# EAGLE board TamarinGroupMonitor1 v25 (EAGLE 9.7.0)
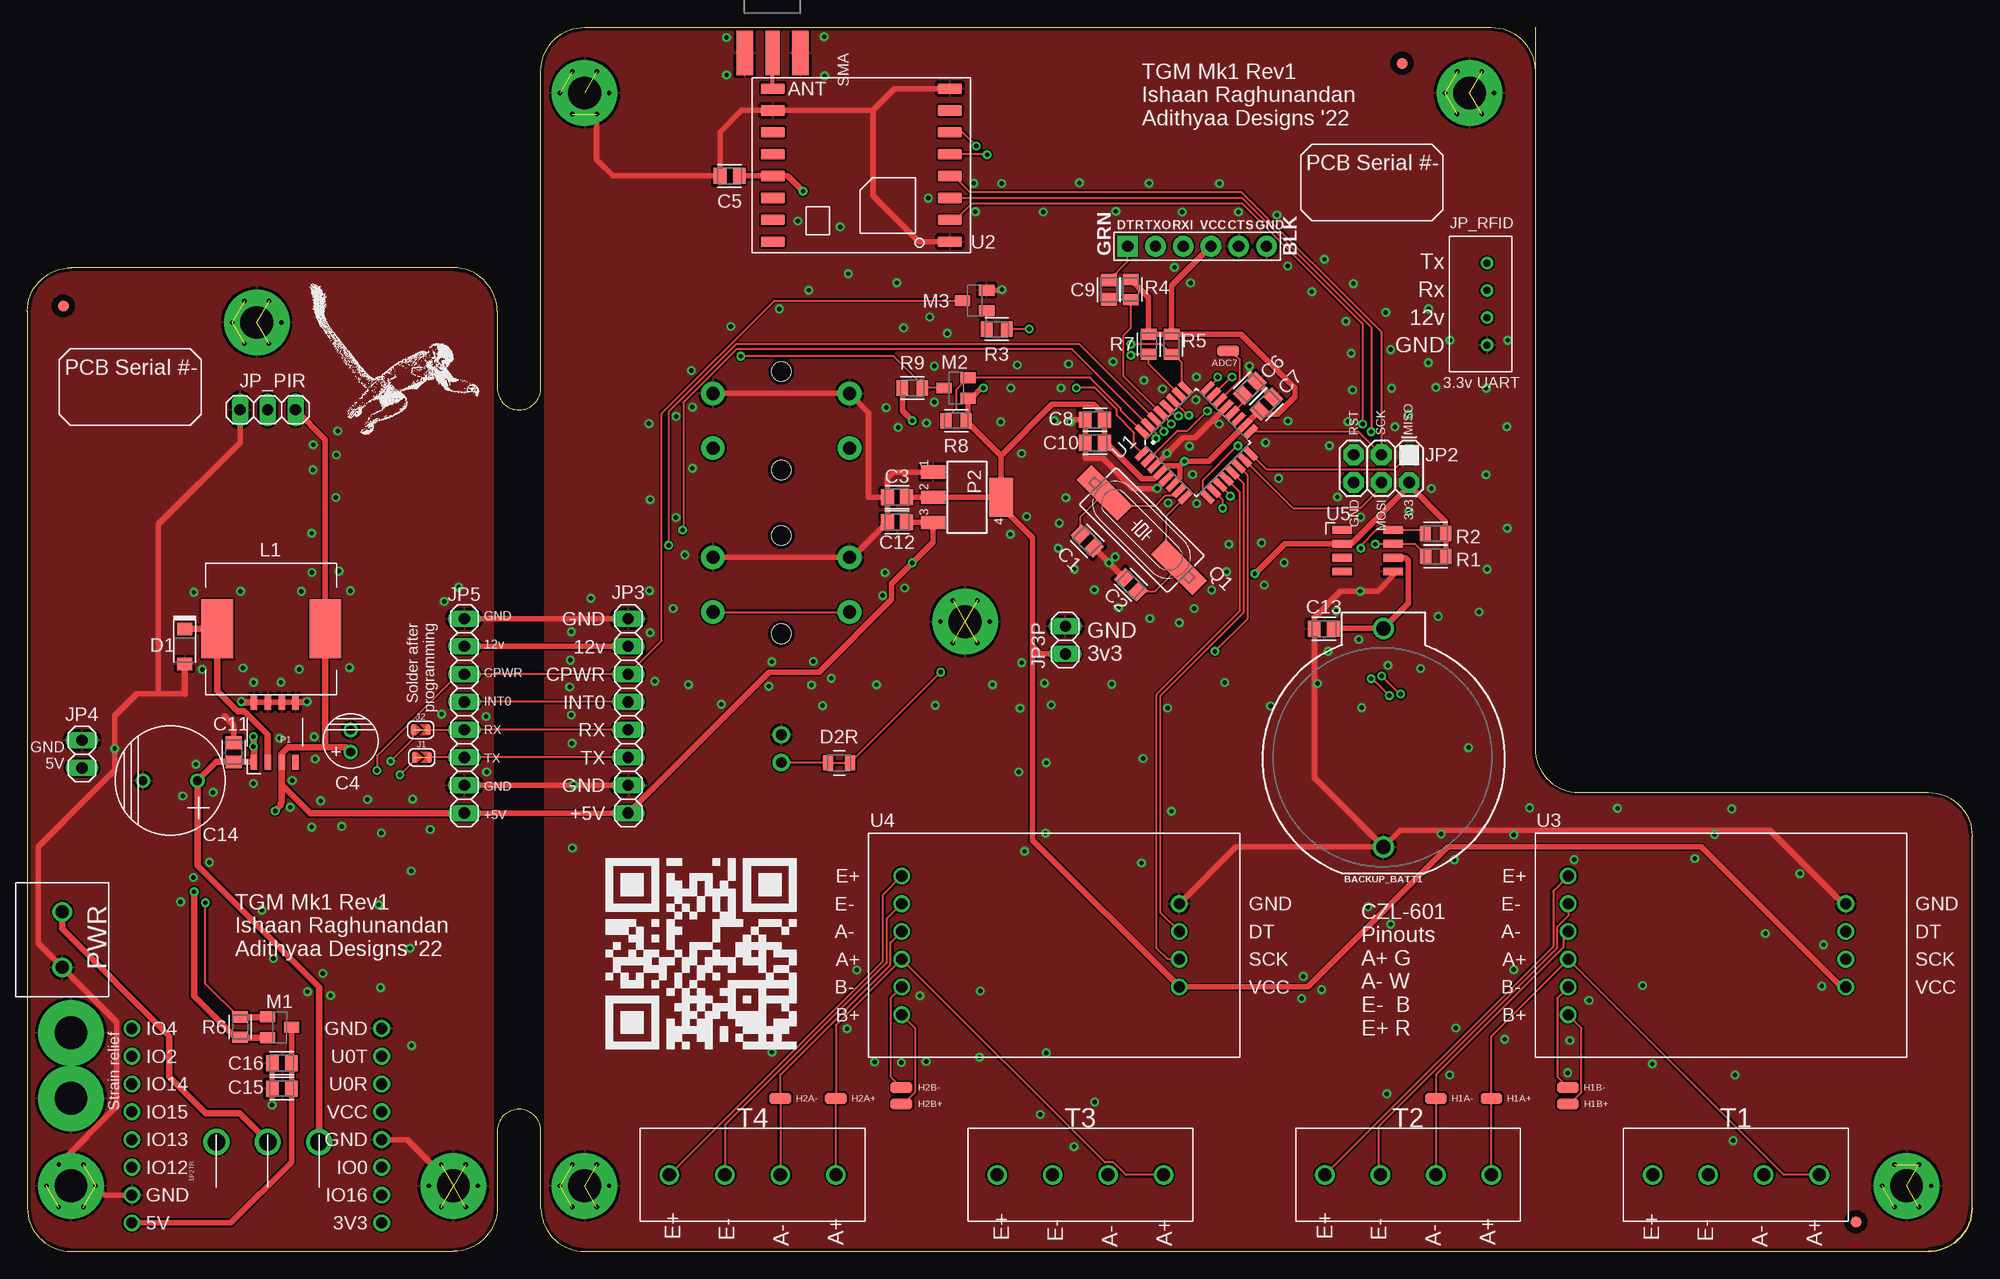
[diagram p0: board, top side]
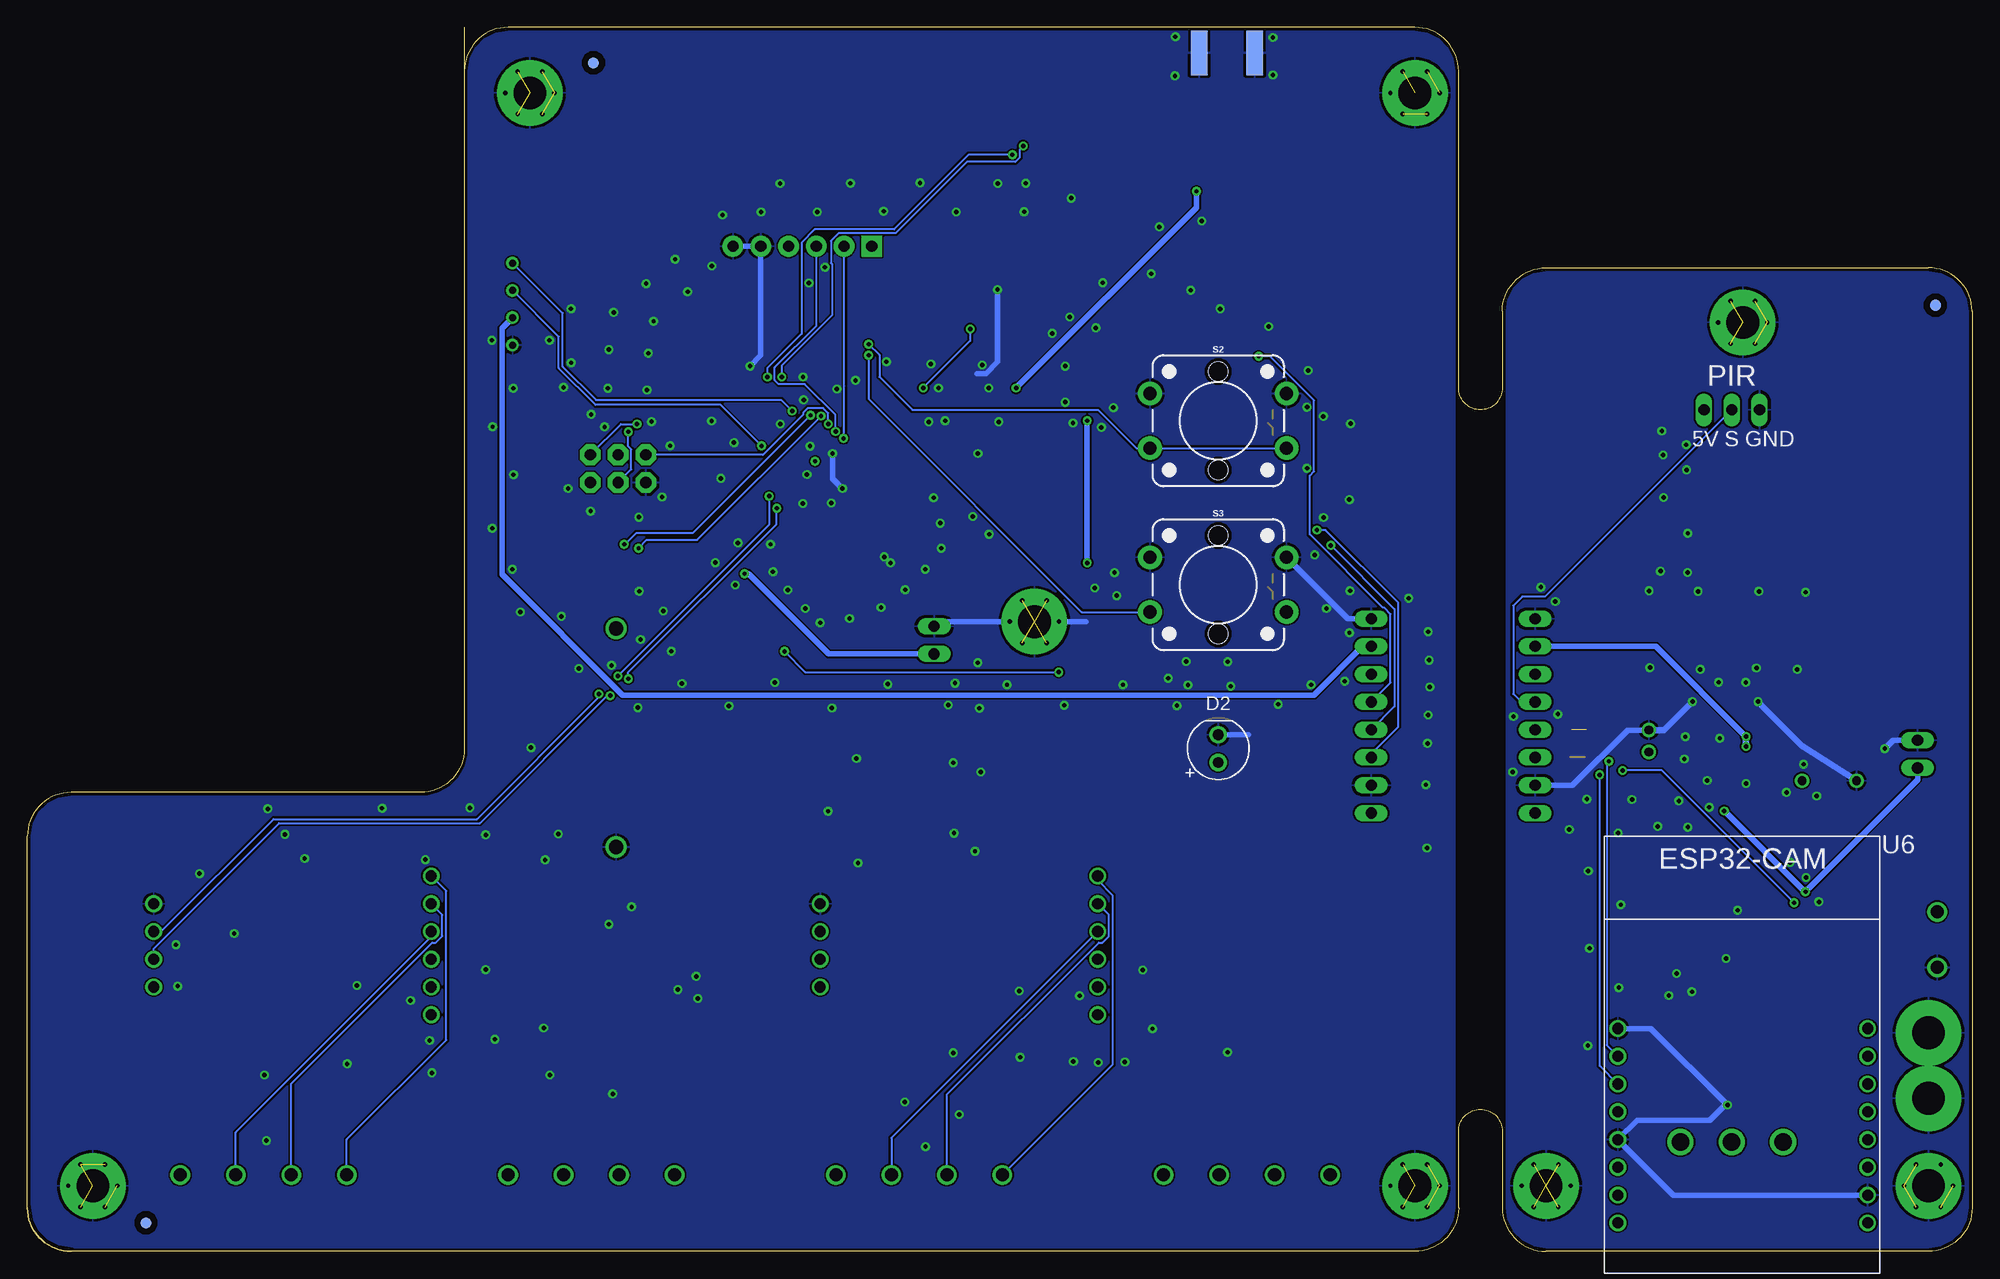
[diagram p1: board, bottom side, seen from below]

Size 178 x 112 mm. Coordinates in mm from the lower left corner, seen from the top.
Outline: 138,112 138,108
Outline: 138,108 138,46 arc90 142,42 174,42 arc-90 178,38 178,4 arc-90 174,0 51,0 arc-90 47,4 47,11 arc90 45,13 arc90 43,11 43,4 arc-90 39,0 4,0 arc-90 0,4 0,86 arc-90 4,90 39,90 arc-90 43,86 43,79 arc90 45,77 arc90 47,79 47,108 arc-90 51,112 134,112 arc-90 138,108
Copper layers (1*16): Top 0.035mm / dielectric 1.5mm / Bottom 0.035mm
Design rules "PCBPower": minimum track width 6mil, minimum drill 0.35mm, track to track 6mil, track to pad 6mil, pad to pad 6mil, via to via 6mil, smd to smd 6mil, copper to edge 12mil, drill to drill 12mil, minimum pad ring 10mil, minimum via ring 8mil, stop-mask expansion 4mil, vias tented up to drill 0.4mm, thermal gap 10mil
Net classes: 1 Power: width 0.5 mm; 2 RF: width 0.35 mm, drill 0.4 mm, clearance 0.203 mm

## Footprints (pad centres in the part's own frame; a part is rotated, then mirrored left to right if it is on the bottom)
BREAKOUT_PAD*1*1X2MM = smd 2 x 1: P$1 0,0
BATTCOM_20MM_PTH = drill 1.3: 1 11.85,0; 2 -8.15,0
CAPC2012X110 = smd 1.165 x 1.465: 1 -0.875,0; 2 0.875,0
CAP_2P_5X11 = drill 0.8: 1 -1,0; 2 1,0
CAP_5P_10X12.5 = drill 0.8: 1 -2.5,0; 2 2.5,0
SODFL3718X115 = smd 1.115 x 1.361: 1 -1.6,0; 2 1.6,0
LEDRD254W60D565H860B_B = drill 0.981 pad 1.581: 1 -1.27,0; 2 1.27,0
RESISTOR_JUMPER_0805_2012 = smd 1 x 1.4: P1 -1,0; P2 1,0
FIDUCIAL_1MM = smd 1 x 1: 1 0,0
MOUNTING_HOLE_3MM = drill 3 pad 6: P1 0,0 | drill 0.4: P2 2.25,0; P3 1.125,-1.948; P4 1.125,1.948; P5 -1.124,-1.948; P6 -2.248,0; P7 -1.124,1.948
PLAIN_HOLE_3MM = drill 3 pad 6: P1 0,0
NO_JUMPER = smd 0.4 x 1: P$1 -0.7,0; P$2 0.7,0
FTDI_DEVICE_SIDE = drill 1.016 pad 1.88 square: P$1 -6.35,0 | drill 1.016 pad 1.88: P$2 -3.81,0; P$3 -1.27,0; P$4 1.27,0; P$5 3.81,0; P$6 6.35,0
2X3 = drill 1.016 pad 1.88 octagon: 1 0,0; 2 0,2.54; 3 2.54,0; 4 2.54,2.54; 5 5.08,0; 6 5.08,2.54
1X08 = drill 1.016 long: 1 -8.89,0; 2 -6.35,0; 3 -3.81,0; 4 -1.27,0; 5 1.27,0; 6 3.81,0; 7 6.35,0; 8 8.89,0
1X02 = drill 1.016 long: 1 -1.27,0; 2 1.27,0
1X03 = drill 1.016 long: 1 -2.54,0; 2 0,0; 3 2.54,0
B4B-XH-A = drill 0.64: 1 0,0; 2 2.5,0; 3 5,0; 4 7.5,0
INDUCTOR_12X12MM = smd 5.4 x 2.9: P$1 0,4.95; P$2 0,-4.95
SOT23 = smd 1 x 1.4: 1 -0.95,-1.1; 2 0.95,-1.1; 3 0,1.1
XL1509_SOIC8 = smd 1.4 x 0.6: P1 -2.75,1.905; P2 -2.75,0.635; P3 -2.75,-0.635; P4 -2.75,-1.905; P5 2.75,-1.905; P6 2.75,-0.635; P7 2.75,0.635; P8 2.75,1.905
SOT223 = smd 1.219 x 2.235: 1 -2.311,-3.099; 2 0,-3.099; 3 2.311,-3.099 | smd 3.6 x 2.2: 4 0,3.099
TERMBLK_508-2N = drill 1.2: 1 0,0; 2 5.08,0
HC49UP = smd 5.334 x 1.93: 1 -4.826,0; 2 4.826,0
RESC2012X65 = smd 1.031 x 1.42: 1 -0.919,0; 2 0.919,0
1P2T_SLIDE_SWITCH_RIGHT = drill 1.6: P1 0,4.7; P2 0,0; P3 0,-4.7
TACTILE_SWITCH_PTH_12MM = drill 1.2 pad 2.159: 1 6.25,-2.5; 2 -6.25,-2.5; 3 6.25,2.5; 4 -6.25,2.5 | hole 1.8: 0,4.5; 0,-4.5
SMA_EDGELAUNCH = smd 4.064 x 1.524: GND@1 2.032,-2.54; GND@2 2.032,2.54 | smd 4.064 x 1.524 bottom: GND@3 2.032,2.54; GND@4 2.032,-2.54 | smd 4.064 x 1.27: P 2.032,0
TERMBLK_508-4N = drill 1.2: 1 0,0; 2 5.08,0; 3 10.16,0; 4 15.24,0
QFP32_7X7_0.80 = smd 1.5 x 0.55: 1 -4.2,2.8; 2 -4.2,2; 3 -4.2,1.2; 4 -4.2,0.4; 5 -4.2,-0.4; 6 -4.2,-1.2; 7 -4.2,-2; 8 -4.2,-2.8; 17 4.2,-2.8; 18 4.2,-2; 19 4.2,-1.2; 20 4.2,-0.4; 21 4.2,0.4; 22 4.2,1.2; 23 4.2,2; 24 4.2,2.8 | smd 0.55 x 1.5: 9 -2.8,-4.2; 10 -2,-4.2; 11 -1.2,-4.2; 12 -0.4,-4.2; 13 0.4,-4.2; 14 1.2,-4.2; 15 2,-4.2; 16 2.8,-4.2; 25 2.8,4.2; 26 2,4.2; 27 1.2,4.2; 28 0.4,4.2; 29 -0.4,4.2; 30 -1.2,4.2; 31 -2,4.2; 32 -2.8,4.2
LORA_RFM95W-915S2_16MODULE = smd 2.2 x 1: P1 -8.1,7; P2 -8.1,5; P3 -8.1,3; P4 -8.1,1; P5 -8.1,-1; P6 -8.1,-3; P7 -8.1,-5; P8 -8.1,-7; P9 8.1,-7; P10 8.1,-5; P11 8.1,-3; P12 8.1,-1; P13 8.1,1; P14 8.1,3; P15 8.1,5; P16 8.1,7
HX711_BREAKOUT = drill 1.016: A+ -13.97,-1.27; A- -13.97,1.27; B+ -13.97,-6.35; B- -13.97,-3.81; DT 11.43,1.27; E+ -13.97,6.35; E- -13.97,3.81; GND 11.43,3.81; SCK 11.43,-1.27; VCC 11.43,-3.81
DS3231MZ+_SOIC8 = smd 1.78 x 0.72: P1 -2.34,1.905; P2 -2.34,0.635; P3 -2.34,-0.635; P4 -2.34,-1.905; P5 2.34,-1.905; P6 2.34,-0.635; P7 2.34,0.635; P8 2.34,1.905
ESP32-CAM-FOOTPRINT = drill 1.016: P1 -11.43,8.89; P2 -11.43,6.35; P3 -11.43,3.81; P4 -11.43,1.27; P5 -11.43,-1.27; P6 -11.43,-3.81; P7 -11.43,-6.35; P8 -11.43,-8.89; P9 11.43,-8.89; P10 11.43,-6.35; P11 11.43,-3.81; P12 11.43,-1.27; P13 11.43,1.27; P14 11.43,3.81; P15 11.43,6.35; P16 11.43,8.89

## Placement (x,y rotation side)
ADC7  BREAKOUT_PADL  [BREAKOUT_PAD*1*1X2MM]  109.9,82.4 0 top
BACKUP_BATT1  [BATTCOM_20MM_PTH]  124.12,45.15 90 top
C1  33pF  [CAPC2012X110]  97,65 135 top
C2  33pF  [CAPC2012X110]  101,61 315 top
C3  10uF  [CAPC2012X110]  79.6,69 0 top
C4  100uF  [CAP_2P_5X11]  29.59,46.7 90 top
C5  0.1uF  [CAPC2012X110]  64.28,98.4 180 top
C6  0.1uF  [CAPC2012X110]  111.9,78.97 225 top
C7  0.1uF  [CAPC2012X110]  113.4,77.5 45 top
C8  0.1uF  [CAPC2012X110]  97.7,76.1 180 top
C9  0.1uF  [CAPC2012X110]  99,88 90 top
C10  4.7uF  [CAPC2012X110]  97.7,74 180 top
C11  1uF  [CAPC2012X110]  18.88,45.66 90 top
C12  10uF  [CAPC2012X110]  79.6,66.7 180 top
C13  1uF  [CAPC2012X110]  118.66,56.98 180 top
C14  470uF  [CAP_5P_10X12.5]  13.08,43.07 180 top
C15  1uF  [CAPC2012X110]  23.3,14.9 180 top
C16  0.1uF  [CAPC2012X110]  23.3,17.2 180 top
D1  [SODFL3718X115]  14.4,55.34 270 top
D2  LED_BLUE  [LEDRD254W60D565H860B_B]  69,46 90 bottom
D2R  [RESISTOR_JUMPER_0805_2012]  74.3,44.7 0 top
F1  FIDUCIAL  [FIDUCIAL_1MM]  3.3,86.5 0 top
F2  FIDUCIAL  [FIDUCIAL_1MM]  167.36,2.7 0 top
F3  FIDUCIAL  [FIDUCIAL_1MM]  125.82,108.7 0 top
F4  FIDUCIAL  [FIDUCIAL_1MM]  3.36,86.57 0 bottom
F5  FIDUCIAL  [FIDUCIAL_1MM]  167.14,2.61 0 bottom
F6  FIDUCIAL  [FIDUCIAL_1MM]  126.19,108.75 0 bottom
H1  MOUNTING_HOLES  [MOUNTING_HOLE_3MM]  51,106 0 top
H1A+  BREAKOUT_PADL  [BREAKOUT_PAD*1*1X2MM]  134,14 0 top
H1A-  BREAKOUT_PADL  [BREAKOUT_PAD*1*1X2MM]  128.92,14 0 top
H1B+  BREAKOUT_PADL  [BREAKOUT_PAD*1*1X2MM]  141,13.5 0 top
H1B-  BREAKOUT_PADL  [BREAKOUT_PAD*1*1X2MM]  141,15 0 top
H2  MOUNTING_HOLES  [MOUNTING_HOLE_3MM]  132,106 0 top
H2A+  BREAKOUT_PADL  [BREAKOUT_PAD*1*1X2MM]  74,14 0 top
H2A-  BREAKOUT_PADL  [BREAKOUT_PAD*1*1X2MM]  68.92,14 0 top
H2B+  BREAKOUT_PADL  [BREAKOUT_PAD*1*1X2MM]  80,13.5 0 top
H2B-  BREAKOUT_PADL  [BREAKOUT_PAD*1*1X2MM]  80,15 0 top
H3  MOUNTING_HOLES  [MOUNTING_HOLE_3MM]  85.83,57.62 0 top
H4  MOUNTING_HOLES  [MOUNTING_HOLE_3MM]  172,6 0 top
H5  MOUNTING_HOLES  [MOUNTING_HOLE_3MM]  51,6 0 top
H6  MOUNTING_HOLES  [MOUNTING_HOLE_3MM]  21,85 0 top
H7  MOUNTING_HOLES  [MOUNTING_HOLE_3MM]  4,6 0 top
H8  MOUNTING_HOLES  [MOUNTING_HOLE_3MM]  39,6 0 top
H9  MOUNTING_HOLESPLAIN  [PLAIN_HOLE_3MM]  4,20 0 top
H10  MOUNTING_HOLESPLAIN  [PLAIN_HOLE_3MM]  4,14 0 top
J1  NO_JUMPER  [NO_JUMPER]  36.1,45.2 0 top
J2  NO_JUMPER  [NO_JUMPER]  36,47.72 0 top
JP1  FTDI_DEVICE  [FTDI_DEVICE_SIDE]  107.06,91.97 0 top
JP2  AVR_SPI_PRG_6PTH  [2X3]  126.47,72.89 180 top
JP3  PINHD-1X8  [1X08]  55,49 90 top
JP3P  PINHD-1X2  [1X02]  95,55.93 90 top
JP4  PINHD-1X2  [1X02]  5,45.5 90 top
JP5  PINHD-1X8  [1X08]  40,49 90 top
JP_PIR  PINHD-1X3  [1X03]  22,77 0 top
JP_RFID  3A/250V  [B4B-XH-A]  133.59,82.93 90 top
L1  68uh  [INDUCTOR_12X12MM]  22.32,56.95 90 top
M1  PMOSFET  [SOT23]  23.1,20.5 270 top
M2  NMOSFET  [SOT23]  85,79 90 top
M3  NMOSFET  [SOT23]  86.7,87 90 top
P1  XL1509  [XL1509_SOIC8]  22.65,47.51 90 top
P2  LDO-LM11173.3MP  [SOT223]  86,69 270 top
PWR  2828XX-2282837-2  [TERMBLK_508-2N]  3.2,31.06 270 top
Q1  4MHz  [HC49UP]  102,66 135 top
R1  4.7k  [RESC2012X65]  128.9,63.58 180 top
R2  4.7k  [RESC2012X65]  128.88,65.68 180 top
R3  470R  [RESC2012X65]  88.72,84.38 180 top
R4  10k  [RESC2012X65]  101,88 270 top
R5  10k  [RESC2012X65]  104.72,83 270 top
R6  10k  [RESC2012X65]  19.48,20.52 90 top
R7  10k  [RESC2012X65]  102.62,83 270 top
R8  10k  [RESC2012X65]  85,76 180 top
R9  10k  [RESC2012X65]  81,79 0 top
S1  1P2T_SLIDE_SWITCHRIGHT  [1P2T_SLIDE_SWITCH_RIGHT]  22,10 90 top
S2  MOMENTARY-SWITCH-SPST-PTH-12MM  [TACTILE_SWITCH_PTH_12MM]  69,76 0 bottom
S3  MOMENTARY-SWITCH-SPST-PTH-12MM  [TACTILE_SWITCH_PTH_12MM]  69,61 0 bottom
SMA  [SMA_EDGELAUNCH]  68.2,111.68 270 top
T1  2828XX-4282837-4  [TERMBLK_508-4N]  164,7 180 top
T2  2828XX-4282837-4  [TERMBLK_508-4N]  134,7 180 top
T3  2828XX-4282837-4  [TERMBLK_508-4N]  104,7 180 top
T4  2828XX-4282837-4  [TERMBLK_508-4N]  74,7 180 top
U1  ATMEGA328P-AU  [QFP32_7X7_0.80]  107,74 45 top
U2  LORA_RFM95W-915S2_MODULE  [LORA_RFM95W-915S2_16MODULE]  76.33,99.39 180 top
U3  HX711_BREAKOUT  [HX711_BREAKOUT]  155,28 0 top
U4  HX711_BREAKOUT  [HX711_BREAKOUT]  94,28 0 top
U5  DS3231MZ+  [DS3231MZ+_SOIC8]  122.66,64.11 0 top
U6  ESP32-CAM  [ESP32-CAM-FOOTPRINT]  21,11.5 0 top
U$1  [SQUIRREL_MONKE]  34,79 0 top
U$2  [TRAKGIT]  51.77,17.24 0 top

## Library data of the parts
ADC7 D2R F1-F6 H1 H1A+ H1A- H1B+ H1B- H2 H2A+ H2A- H2B+ H2B- H3-H10 J1 J2 JP1 JP2 SMA U3 U4 U6 U$1 U$2 = CDC Library
BACKUP_BATT1 = CDC Library; LINK: https://www.evelta.com/3v-litium-battery-holder/; PROD_ID: BATT-09031; SF_SKU: PRT-00783
C1 C2 = Capacitor; CATEGORY: Capacitor; LINK: https://www.evelta.com/33-pf-50v-0805-smd-multilayer-ceramic-capacitors-0805cg330j500nt-fenghua/
C3 C12 = Capacitor; CATEGORY: Capacitor; LINK: https://www.sunrom.com/p/10uf-106-smd-0805-pack-of-10
C4 = CDC Library; LINK: https://www.evelta.com/100uf-25v-electrolytic-capacitor/
C5-C9 C16 = Capacitor; CATEGORY: Capacitor; LINK: https://www.sunrom.com/p/100nf-104-0805-2012-metric
C10 = Capacitor; CATEGORY: Capacitor; LINK: https://www.evelta.com/4-7-uf-16v-0805-smd-multi-layer-ceramic-capacitor-0805x475k160ct-walsin/
C11 C13 C15 = Capacitor; CATEGORY: Capacitor; LINK: https://www.sunrom.com/p/1uf-105-smd-0805-pack-of-10
C14 = CDC Library; LINK: https://www.evelta.com/470uf-25v-electrolytic-capacitor/
D1 = CDC Library; LINK: https://www.sunrom.com/p/1n5819-b5819w-1n5819w-s4-sod123-1206-1a-40v-schottky-diode
D2 = Opto-Electronic; CATEGORY: Opto-Electronic; LINK: https://www.sunrom.com/p/blue-led-3mm; SUB-CATEGORY: LED
JP3 JP3P JP4 JP5 JP_PIR = Connector; CATEGORY: CONNECTOR; SUB-CATEGORY: PIN-HEADER
JP_RFID = Connector; CATEGORY: CONNECTOR; DSECRIPTION: 2.5mm pitch/disconnctable crimp style connector; MANUFACTURER: JST (XH connector); MPN: B4B-XH-A; OPERATING_TEMPERATURE: -25 C to 85 C; PART_STATUS: ACTIVE; ROHS_COMPLIANT: COMPLAINT; SERIES: B4B-XH-A; SUB_CATEGORY: Through hole; TYPE: TOP ENTRY
L1 = CDC Library; LINK: https://www.sunrom.com/p/68uh-680-12mm-inductor
M1 = Transistor; CATEGORY: Transistor; LINK1: https://www.sunrom.com/p/ao3401-a19t-sot-23-p-ch-mosfet; SUB-CATEGORY: MOSFET; TYPE: P-Channel
M2 M3 = Transistor; CATEGORY: Transistor; LINK: https://www.evelta.com/bss138lt1g-50v-220ma-n-channel-transistor-surface-mount-sot-23-3/; SUB-CATEGORY: MOSFET; TYPE: N-Channel
P1 = CDC Library; LINK: https://www.sunrom.com/m/6161
P2 = CDC Library; LINK: https://www.sunrom.com/m/4004; MF: Texas Instruments; MPN: LM1117MP-3.3; OC_FARNELL: 9778195; OC_NEWARK: 28X3416
PWR = Connector; CATEGORY: Connector; DESCRIPTION: 2 Position Wire to Board Terminal Block Horizontal with Board 5.08 mm Through Hole; LINK: https://robu.in/product/12v-8-x-aa-battery-clip-slot-holder-stack-box-case/; MANUFACTURER: TE Connectivity; MPN: 282837-2; OPERATING_TEMPERATURE: -40°C to +105°C; PART_STATUS: ACTIVE; ROHS_COMPLIANCE: RoHS Compliant; SERIES: 282837; SUBCATEGORY: Terminal Block; TYPE: Side Wire Entry
Q1 = CDC Library; LINK: https://www.evelta.com/hc-49smd-4mhz-20pf-20ppm-2pad-smd-smt-quartz-crystal/; OC_FARNELL: unknown; OC_NEWARK: unknown
R1 R2 = Resistor; CATEGORY: Resistor; LINK: https://www.sunrom.com/p/4k7-1-0805-pack-of-100; SUB-CATEGORY: Fixed
R3 = Resistor; CATEGORY: Resistor; LINK: https://www.sunrom.com/p/470r-1-0805-pack-of-100; SUB-CATEGORY: Fixed
R4-R9 = Resistor; CATEGORY: Resistor; LINK: https://www.sunrom.com/p/10k-1-0805-pack-of-100; SUB-CATEGORY: Fixed
S1 = CDC Library; LINK: https://www.sunrom.com/p/slide-switch-1p2t-high-current-right-angle
S2 S3 = CDC Library; LINK: https://www.sunrom.com/p/tactile-switch-square-head-omron-b3f-4055-12x12x73mm; PROD_ID: SWCH-09185; SF_SKU: COM-09190
T1-T4 = Connector; CATEGORY: Connector; DESCRIPTION: TERM BLK 4P SIDE ENT 5.08mm PCB; MANUFACTURER: TE Connectivity; MPN: 282837-4; OPERATING_TEMPERATURE: 40°C to +105°C; PART_STATUS: Active; ROHS_COMPLIANCE: RoHS Compliant; SERIES: 283737; SUBCATEGORY: Terminal Block; TYPE: Side Wire Entry
U1 = CDC Library; LINK: https://www.evelta.com/atmega328p-au-ic-mcu-8bit-32kb-flash-32tqfp/
U2 = CDC Library; LINK: https://www.digikey.in/product-detail/en/rf-solutions/RFM95W-915S2/RFM95W-915S2-ND/6564923
U5 = CDC Library; LINK: https://www.evelta.com/ds3231mz-maxim-integrated-alarm-rtc-i2c-2-3-v-to-5-5-v/

## Nets
+3.3V [Power]: C3.2 C5.1 C7.1 C8.1 C10.1 JP1.P$4 JP2.2 JP3P.1 M2.1 P2.2 P2.4 R1.1 R2.1 R4.1 R5.1 R7.1 R8.1 U1.4 U1.6 U1.18 U2.P13 U3.VCC U4.VCC U5.P2
+5V [Power]: C4.1 C12.1 JP3.1 JP4.1 JP5.1 JP_PIR.3 L1.P$2 M1.2 P1.P3 P2.3 R6.1 R9.1
+12V [Power]: C11.1 C14.1 JP3.7 JP5.7 JP_RFID.2 P1.P1 S1.P3
ADC7: ADC7.P$1 U1.22
AREF: C6.2 U1.20
BATT [Power]: PWR.1 S1.P2
CAMPWR: JP3.6 JP5.6 M1.1 M3.3 R6.2
CPWR: M3.1 R3.2
CPWR_3V3: R3.1 U1.1
CS_LR: U1.23 U2.P5
DTR: C9.2 JP1.P$1
ESP32_PWR [Power]: C15.1 C16.1 M1.3 U6.P8
GND [Power]: BACKUP_BATT1.2 C1.1 C2.1 C3.1 C4.2 C5.2 C6.1 C7.2 C8.2 C10.2 C11.2 C12.2 C13.2 C14.2 C15.2 C16.2 D1.2 D2.2 H1.P1 H1.P2 H1.P3 H1.P4 H1.P5 H1.P6 H1.P7 H2.P1 H2.P2 H2.P3 H2.P4 H2.P5 H2.P6 H2.P7 H3.P1 H3.P2 H3.P3 H3.P4 H3.P5 H3.P6 H3.P7 H4.P1 H4.P2 H4.P3 H4.P4 H4.P5 H4.P6 H4.P7 H5.P1 H5.P2 H5.P3 H5.P4 H5.P5 H5.P6 H5.P7 H6.P1 H6.P2 H6.P3 H6.P4 H6.P5 H6.P6 H6.P7 H7.P1 H7.P2 H7.P3 H7.P4 H7.P5 H7.P6 H7.P7 H8.P1 H8.P2 H8.P3 H8.P4 H8.P5 H8.P6 H8.P7 H9.P1 H10.P1 JP1.P$5 JP1.P$6 JP2.6 JP3.2 JP3.8 JP3P.2 JP4.2 JP5.2 JP5.8 JP_PIR.1 JP_RFID.1 M3.2 P1.P5 P1.P6 P1.P7 P1.P8 P2.1 PWR.2 S2.3 S2.4 S3.3 S3.4 SMA.GND@1 SMA.GND@2 SMA.GND@3 SMA.GND@4 U1.3 U1.5 U1.21 U2.P1 U2.P8 U2.P10 U3.GND U4.GND U5.P5 U6.P7 U6.P12 U6.P16
HC1A+: H1A+.P$1 T1.1 T2.1 U3.A+
HC1A-: H1A-.P$1 T1.2 T2.2 U3.A-
HC1B+: H1B+.P$1 U3.B+
HC1B-: H1B-.P$1 U3.B-
HC1E+: T1.4 T2.4 U3.E+
HC1E-: T1.3 T2.3 U3.E-
HC2A+: H2A+.P$1 T3.1 T4.1 U4.A+
HC2A-: H2A-.P$1 T3.2 T4.2 U4.A-
HC2B+: H2B+.P$1 U4.B+
HC2B-: H2B-.P$1 U4.B-
HC2E+: T3.4 T4.4 U4.E+
HC2E-: T3.3 T4.3 U4.E-
HX1DT: U1.11 U3.DT
HX1SCK: U1.10 U3.SCK
HX2DT: U1.13 U4.DT
HX2SCK: U1.12 U4.SCK
INT0: JP3.5 JP5.5 JP_PIR.2 M2.3 R9.2
INT0_3V3: M2.2 R8.2 U1.32
LED1: D2R.P2 U1.14
LED1A: D2.1 D2R.P1
LR_ANT [RF]: SMA.P U2.P9
MISO: JP2.1 U1.16 U2.P2
MOSI: JP2.4 U1.15 U2.P3
Q1: C2.2 Q1.1 U1.8
Q2: C1.2 Q1.2 U1.7
RESET_LR: U1.24 U2.P6
RFID_RX: JP_RFID.3 U1.9
RFID_TX: JP_RFID.4 U1.2
RST: C9.1 JP2.5 R4.2 U1.29
RTC_BATT [Power]: BACKUP_BATT1.1 C13.1 U5.P6
RXI: J2.P$1 J2.P$2 JP1.P$3 JP3.4 JP5.4 U1.30 U6.P15
SCK: JP2.3 U1.17 U2.P4
SCL: R2.2 U1.28 U5.P8
SDA: R1.2 U1.27 U5.P7
SW2: R5.2 S2.1 S2.2 U1.25
SW3: R7.2 S3.1 S3.2 U1.26
TXO: J1.P$1 J1.P$2 JP1.P$2 JP3.3 JP5.3 U1.31 U6.P14
XLVO [Power]: D1.1 L1.P$1 P1.P2

## Tracks (layer width: path | path; a pad name or v marks a point on that pad's centre or on a via)
+3.3V  (via drill 0.4)
  Top 0.5: U1.6 104.88,70.23 105.49,70.84 105.49,71.89 | 105.49,71.89 105.39,71.79 105.39,71.89 104.32,71.89 U1.4 103.13,70.7 102,70.7 98.7,74 C10.1 C8.1 98.58,76.53 97.6,77.5 93.78,77.5 89.1,72.82 | 105.49,71.89 v105.9,72.3 108.13,72.3 U1.18 112.71,76.88 C7.1 113.06,76.6 114.4,76.6 116,78.2 116,79 111.08,83.92 R5.1 | U3.VCC 166.03,24.19 153.22,37 130,37 117.19,24.19 U4.VCC 92,37.62 92,54.66 | C3.2 P2.2 P2.4 | 92,54.66 92,55.4 | 92,55.4 92,65.3 89.1,68.2 P2.4 | 89.1,72.82 R8.1 86.1,76.18 M2.1 86.4,78.05 87.35,79 v87.5,79 | 89.1,72.82 P2.4 | JP3P.1 92.74,54.66 | 92.74,54.66 92,55.4 | 92.74,54.66 92,54.66 | R1.1 129.82,65.66 R2.1 129.8,66.78 126.47,70.11 | 126.47,70.11 126.47,70 126.42,70 121.17,64.75 U5.P2 115.1,64.75 v112.35,62 | 126.47,70.11 JP2.2 | R4.1 102.62,87.3 R7.1 R5.1 | JP1.P$4 104.72,88.36 R5.1 | C5.1 U2.P13 | U2.P13 | v71,97 69.6,98.4 U2.P13
  Bottom 0.5: JP3P.1 104.66,54.66 112,62 v112.35,62 | v87.5,79 71,95.5 v71,97
+5V  (via drill 0.4)
  Top 0.5: C12.1 P2.3 82.9,64.9 v81,63 79.11,61.11 79.11,59.67 72.44,53 67.89,53 JP3.1 JP5.1 | R9.1 80.08,76.92 v81,76 | JP_PIR.3 27.27,74.27 L1.P$2
  Top 0.61: JP5.1 25.89,40.11 23.28,42.72 | 23.28,42.72 P1.P3 23.28,45.54 23.87,46.12 27,46.12 | 27,46.12 29.17,46.12 C4.1 | L1.P$2 27.27,46.39 27,46.12 | M1.2 19.53,19.55 R6.1 19.01,19.6 15.26,23.35 v15.26,32.9 | 23.28,42.72 23.28,41.07 23.21,41 23.21,40.81 v22.7,40.3
  Bottom 0.5: v81,76 v81,63 | v15.26,32.9 5,43.16 JP4.1
  Bottom 0.61: v15.26,32.9 15.3,32.9 v22.7,40.3
+12V  (via drill 0.4)
  Top 0.5: JP5.7 JP3.7
  Top 0.61: S1.P3 26.7,24.16 15.58,35.28 C14.1 15.58,43.09 17.28,44.78 C11.1 20.72,44.78 P1.P1 20.74,46.2 v20.7,46.2 v20.7,47.1
  Bottom 0.5: v20.7,47.1 28.95,55.35 JP5.7 | JP3.7 55.8,55.35 60.25,50.9 123.5,50.9 134.57,61.96 134.57,84.45 JP_RFID.2
+12V1
  Bottom 0.61: 20.7,47.05 20.7,46.15
ADC7
  Top 0.2: U1.22 111,79.7 111,81.6 110.2,82.4 ADC7.P$1
AREF
  Top 0.2: U1.20 111.28,77.72 C6.2
BATT
  Top 0.61: PWR.1 3.2,29.5 13,19.7 13,16 16.34,12.66 19.43,12.66 22,10.09 S1.P2
CAMPWR  (via drill 0.4)
  Top 0.2: 19.37,21.44 16.3,24.51 v16.3,31.9 | v32,44 32,45.36 39.45,52.81 JP5.6 JP3.6 58.04,55.85 58.04,76.67 68.37,87 M3.3
  Top 0.5: M1.1 21.99,21.44
  Top 0.61: 21.99,21.44 R6.2 19.37,21.44
  Bottom 0.2: v16.3,31.9 28.4,44 v32,44
CPWR
  Top 0.2: R3.2 M3.1
CPWR_3V3  (via drill 0.4)
  Top 0.2: U1.1 101.3,73.76 101.3,74.9 99.71,76.49 99.71,77 97.71,79 v96,79 | v91.7,84.4 91.68,84.38 R3.1
  Bottom 0.2: v96,79 91.7,83.3 v91.7,84.4
CS_LR  (via drill 0.4)
  Top 0.2: v110.26,80 110.17,80 U1.23 | v87.84,100.34 87.8,100.39 U2.P5
  Bottom 0.2: v87.84,100.34 91.84,100.34 98.67,93.52 105.93,93.52 107.14,92.31 107.14,83.96 110.28,80.81 110.28,80.08 110.26,80.06 v110.26,80
DTR
  Top 0.2: C9.2 100.71,90.58 JP1.P$1
ESP32_PWR
  Top 0.5: U6.P8 18.61,2.61 24.17,8.18 C15.1 C16.1 24.17,20.48 M1.3
GND  (via drill 0.4)  (30 unrouted)
  Top 0.5: C1.1 v99,63 C2.1 | U1.5 103.4,69.83 v103.4,69.8 101.2,69.8 98.44,72.56 96.83,72.56 C10.2 C8.2 95.7,76.1 v95.5,75.9 | U1.3 v104.3,73 105.75,74.45 106.89,74.45 U1.21 | U3.GND 166.19,31.81 159.47,38.53 125.65,38.53 BACKUP_BATT1.2 | C3.1 78.72,70.72 79.31,71.31 P2.1 | C3.1 C12.2 75.53,63.5 S3.4 S3.3 | S2.3 S2.4 77,76.75 77,69 C3.1 | U4.GND 110.62,37 BACKUP_BATT1.2 | U5.P5 125,61.8 123.6,60.4 v122,60.4 120.2,60.4 117.78,57.98 C13.2 117.78,43.34 BACKUP_BATT1.2 | JP3.2 JP5.2 | JP3.8 JP5.8 | C7.2 112.55,79.59 C6.1 111.86,80.25 v111.86,81 | M3.2 89.15,87.95 v89.2,88 | U2.P8 79.39,106.39 77.39,104.39 | 77.39,104.39 U2.P10 65.39,104.39 63.41,102.41 C5.2 53.6,98.4 52.12,99.88 H1.P3 | U2.P1 81.61,92.39 77.39,96.61 77.39,104.39 | H8.P1 34.77,10.23 U6.P12 | H7.P7 8.2,13.27 8.2,20.98 PWR.2 1,28.18 1,37 8,44 v8,46 8,49 10,51 12,51 | U6.P7 7.1,5.15 H7.P2 | P1.P5 P1.P8 | C16.2 C15.2 22.42,13.43 v22.4,13.4 | 12,51 14.4,51 | JP_PIR.1 19.46,74 12,66.54 12,51 | C11.2 18.88,48.12 18,49
  Top 0.61: D1.2 14.4,51 | P1.P5 25.56,50.26 v25.6,50.3 | P1.P8 19.64,50.26 v19.6,50.3
  Bottom 0.5: JP3P.2 94.58,57.62 H3.P2 | H3.P1 81.13,57.62 | JP1.P$6 JP1.P$5 110.87,81.99 v111.86,81 | v103.4,69.8 104.3,70.7 v104.3,73 | 55.6,57.89 JP3.8 57.14,57.89 S3.3 | 91.08,80.32 90.28,80.32 89.2,81.4 v89.2,88 | U6.P7 27.35,5.15 U6.P12 30.66,12 24,12 22.5,13.5 | v22.4,13.4 22.5,13.5 | 22.5,13.5 29.39,20.39 U6.P16 | JP4.2 7.23,46.77 v8,46 | 66.22,47.27 D2.2 | JP5.2 36.59,42.65 31.53,47.7 C4.2
  Bottom 0.61: C4.2 28.2,47.7 v25.6,50.3 | C14.2 15.58,46.28 v19.6,50.3
  other vias: 107,80 103.9,78.9 102.2,79.7 89.1,75.9 90.6,81.1 94.6,79 95.3,81.2 83,81 84.2,84 82.6,85.5 80.2,84.5 78.5,62.1 78.3,60 80.3,60.7 99.37,81.4 91,73 94,76 90,79 82.3,75.8 79.7,75.4 78.6,77.2 83,77.7 49.9,36.9 50,42.7 49.8,56.7 49.7,54.1 57,56.6 17,42 106.36,73.68 109.09,75.71 106.95,77.91 106.65,71.09 113.33,74 115.37,75.97 120.87,75.92 119.17,73.71 114.52,70.73 119.9,69.03 122.03,67.18 126.45,67.73 128.51,69.81 125.17,75.44 115.36,90.16 118.71,90.78 117.56,87.81 121.37,88.55 120.68,85.1 124.33,85.92 124.77,82.51 121.16,82.18 124.87,78.98 121.29,78.81 130.21,83.37 128.24,86.25 128.23,81.31 128.92,79.06 126.4,76.59 133.61,62.41 135.45,66.16 133.5,71.06 135.41,75.45 133.53,78.98 135.49,83.37 132.87,58.5 129.12,58.1 127.53,53.34 124.52,53.62 122.13,49.75 118.08,51.96 113.78,49.9 109.58,52.05 104.36,49.72 99.24,51.9 93.71,50 88.34,51.84 83.09,49.97 77.72,51.84 72.78,49.93 67.87,51.71 63.52,50.06 60.51,51.84 57.44,52.17 81.69,23.39 87.21,23.83 87.14,17.76 93.25,18.16 92.7,12.53 95.79,9.58 97.7,13.67 79.98,17.28 77.55,17.33 82.26,17.37 75.02,20.37 68.15,18.22 75.91,25.74 142.93,22.96 140.97,16.33 141.18,19.3 156.11,10.13 156.29,16.14 148.73,17.16 147.84,24.32 135.2,19.41 130.17,16.14 130.74,20.43 124.42,14.41 136.04,25.78 164.4,28.05 162.23,34.56 154.43,38.16 145.53,40.54 136.04,38.11 131.9,46.09 137.49,40.58 155.99,40.49 91.47,67.24 89.97,65.62 90.86,49.69 93.1,51.99 91.01,53.86 93.19,38.27 91.26,36.61 152.62,35.95 130.61,35.82 129.39,38.19 141.56,35.84 116.78,25.16 116.63,23.14 118.47,23.95 49.85,46.48 49.79,49.08 49.64,51.64 37.92,49.16 41.99,48.94 32.41,38.28 35.14,34.81 32.16,31.72 35.03,27.74 32.34,24.13 35.18,18.82 15.2,34.21 16.67,35.59 14.03,31.98 15.44,44.57 14.23,41.66 24.07,40.64 24.25,43.08 23.1,46.95 23.22,52.08 20.72,52.06 20.7,42.81 26.05,62.12 28.53,62.24 28.41,75.07 26.17,73.81 26.14,71.51 39.48,60.78 38.16,59.47 51.57,59.76 59.39,76.4 59.37,67.15 86.62,97.73 86.77,95.12 82.45,96.37 89.18,97.71 92.98,95.11 96.3,97.77 99.63,95.17 102.67,97.73 105.7,95.11 109.11,97.71 110.85,95.11 114.37,94.83 64,111.07 64,107.64 72.97,107.56 72.93,111.14 102.12,45.09 104.72,40.27 101.97,35.54 93.26,44.71 90.74,43.87 159.07,29.09 164.24,24.27 124.77,29.93 122.7,31.52 113.2,60.97 115.03,63.02 121.87,55.99 119.79,58.6 119.05,54.91 112.96,64.83 109.98,64.7 107.02,68.43 109.76,62.18 108.4,60.52 106.79,58.83 105.44,57.52 102.75,57.91 99.86,58.91 97.66,60.54 95.82,62.41 94.36,64.33 94.44,66.63 95.05,68.96 104.41,68.47 99.57,63.55 105,90.05 106.46,88.61 70.51,94.28 74.39,93.74 75.14,89.45 79.58,88.63 68.83,86.24 71.52,87.94 64.38,84.62 60.88,77.25 56.9,75.74 60.77,80.6 60.88,71.65 57.01,68.78 60.18,63.73 56.94,60.45 59.1,58.83 25.65,23.76 27.05,25.42 27.76,23.42 22.52,26.79 21.48,31.21 26.02,38.82 26.85,41.22 28.78,38.89 31.14,41.34 35.27,41.38 36.88,38.6 42.05,43.87 26.25,47.09 26.34,45.05 15.25,60.31 19.52,60.39 25.09,60.39 29.57,60.44 29.49,53.41 24.89,53.25 19.75,53.38 16.02,53.25 28.24,68.98 28.29,72.87 26.02,65.71 68.14,53.95 71.94,53.97 73.59,52.44 71.78,51.82
  pour Bottom: -24,112 179,112 179,0 -24,0
  pour Top: 178,0 -24,0 -24,112 178,112
HC1A+
  Top 0.2: T2.1 H1A+.P$1 134,19.7 U3.A+ 160.76,7 T1.1
HC1A-
  Top 0.2: T2.2 H1A-.P$1 128.92,16.16 140.58,27.82 140.58,28.82 U3.A-
  Bottom 0.2: U3.A- 141.03,28.77 158.92,10.88 T1.2
HC1B+
  Top 0.2: H1B+.P$1 141.18,13.5 142.25,14.57 142.25,20.43 U3.B+
HC1B-
  Top 0.2: U3.B- 140.02,23.18 140.02,15.98 H1B-.P$1
HC1E+
  Top 0.2: T2.4 139.65,27.89 139.65,32.97 U3.E+
  Bottom 0.2: T1.4 148.76,10.24 139.66,19.34 139.66,32.98 U3.E+
HC1E-
  Top 0.2: T2.3 123.67,7.17 123.67,11.41 140,27.75 140,29.68 141.03,30.7 U3.E-
  Bottom 0.2: T1.3 153.84,15.36 140.94,28.26 140.61,28.26 140.02,28.85 140.02,30.8 U3.E-
HC2A+
  Top 0.2: T4.1 H2A+.P$1 74,20.7 U4.A+ 98.61,8.15 99.4,8.15 100.55,7 T3.1
HC2A-
  Top 0.2: T4.2 H2A-.P$1 68.92,16.16 79,26.25 79,28.24 U4.A-
  Bottom 0.2: U4.A- 98.92,10.38 T3.2
HC2B+
  Top 0.2: U4.B+ 81.25,20.43 81.25,14.57 80.18,13.5 H2B+.P$1
HC2B-
  Top 0.2: U4.B- 79.02,23.18 79.02,15.98 H2B-.P$1
HC2E+
  Top 0.2: T4.4 78.3,26.54 78.3,32.62 U4.E+
  Bottom 0.2: U4.E+ 80.03,33.95 78.66,32.58 78.66,17.1 T3.4
HC2E-
  Top 0.2: T4.3 63.84,11.58 78.65,26.39 78.65,30.43 U4.E-
  Bottom 0.2: T3.3 93.84,14.36 79.94,28.26 79.61,28.26 79.02,28.85 79.02,30.8 U4.E-
HX1DT  (via drill 0.4)
  Top 0.2: U1.11 110.1,69.2 v110.1,69.1 | v123.96,52.64 125.6,51 v125.7,51
  Bottom 0.2: U3.DT 165.73,29.27 155.46,39.54 136.85,39.54 125.7,50.7 v125.7,51 | v110.1,69.1 110.1,66.5 v123.96,52.64
HX1SCK  (via drill 0.4)
  Top 0.2: U1.10 109.4,68.77 v109.4,68 | v124.66,50.85 123.11,52.4 v123,52.4
  Bottom 0.2: v109.4,68 109.45,67.95 109.45,66.55 123,53 v123,52.4 | U3.SCK 166.43,27.71 154.95,39.19 136.58,39.19 124.91,50.85 v124.66,50.85
HX2DT
  Top 0.2: U1.13 111.34,70.22 111.34,58.47 103.7,50.83 103.7,31 U4.DT
HX2SCK
  Top 0.2: U4.SCK 104.38,26.73 103.35,27.76 103.35,50.98 110.99,58.62 110.99,69.44 U1.12
INT0  (via drill 0.4)
  Top 0.2: M2.3 R9.2 81.92,79.28 79.3,81.9 v65.3,81.9 | JP3.5 JP5.5
  Bottom 0.2: JP_PIR.2 39.1,59.9 41.18,59.9 42,59.09 42,51 41.27,50.27 JP5.5 | JP3.5 53.22,52.05 53.22,58.31 53.82,58.9 53.93,58.9 60.62,65.6 60.62,70.98 60.22,71.38 60.22,77.86 64.27,81.9 v65.3,81.9
INT0_3V3
  Top 0.2: R8.2 84.08,76.2 85,77.12 85,78.85 M2.2 97.26,79.95 100.06,77.15 100.06,76.98 U1.32
LED1  (via drill 0.4)
  Top 0.2: U1.14 110.83,71.88 111.7,71.02 111.7,57.9 v108.7,54.9 | D2R.P2 v83.6,53
  Bottom 0.2: v108.7,54.9 106.8,53 v83.6,53
LED1A
  Top 0.2: D2R.P1 69.03,44.7 D2.1
LR_ANT
  Top 0.35: U2.P9 68.2,106.42 SMA.P
MISO  (via drill 0.4)
  Top 0.2: U1.16 113.42,71.54 125.12,71.54 JP2.1 | U2.P2 84.96,94.39 86.42,95.85 111.22,95.85 122.2,84.87 v122.2,75.7
  Bottom 0.2: v122.2,75.7 123.66,75.7 JP2.1
MOSI  (via drill 0.4)
  Top 0.2: U1.15 115.83,68 122,68 123.93,69.93 JP2.4 | U2.P3 111.17,96.39 123,84.56 v123,75
  Bottom 0.2: v123,75 123,73.65 122.74,73.38 122.74,71.54 JP2.4
Q1
  Top 0.2: U1.8 104.21,67.25 104.21,63.79 Q1.1 103.21,60.38 C2.2
Q2
  Top 0.2: C1.2 96.38,67.21 Q1.2 99.8,68.2 103.21,68.2 104.14,69.13 104.95,69.13 U1.7
RESET_LR  (via drill 0.4)
  Top 0.2: U2.P6 85.61,102.39 v86.86,101.14 | U1.24 108.95,79.91 v108.95,80
  Bottom 0.2: v86.86,101.14 87.19,100.81 87.19,100.07 87.57,99.69 92,99.69 98.53,93.16 103.74,93.16 104.44,92.46 104.44,90.42 104.34,90.32 104.34,85.66 108.95,81.05 v108.95,80
RFID_RX  (via drill 0.4)
  Top 0.2: U1.9 107.97,69.05 107.58,69.45 107.58,70.56 110.72,73.7 v110.8,73.7
  Bottom 0.2: JP_RFID.3 129.35,83.69 129.35,80.81 125.99,77.45 114.55,77.45 v110.8,73.7
RFID_TX  (via drill 0.4)
  Top 0.2: U1.2 105.27,75.1 106.2,75.1 v108,76.9
  Bottom 0.2: v108,76.9 109,77.9 125.95,77.9 129,80.95 129,85.84 JP_RFID.4
RST  (via drill 0.4)
  Top 0.2: v104.7,75.7 104.7,75.73 U1.29 100.34,80.09 100.34,83.84 101,84.49 101,87 | 101,87 R4.2 | C9.1 100.88,87.12 101,87
  Bottom 0.2: v104.7,75.7 104.7,76.7 105.16,77.16 106.59,77.16 107,76.74 107,76.57 110.68,72.89 JP2.5
RTC_BATT
  Top 0.5: U5.P6 126.12,63.48 126.4,63.2 126.4,59.28 BACKUP_BATT1.1 119.56,57 C13.1
RXI  (via drill 0.4)  (1 unrouted)
  Top 0.2: JP3.4 JP5.4 J2.P$2 | v104.02,75.02 104.02,75.28 U1.30 96.32,82.98 64.85,82.98 58.71,76.84 v58.71,64.61 v58.7,64.6 | J2.P$1 35.3,46.9 v33.25,44.85
  Bottom 0.2: v104.02,75.02 104.04,75.04 104.04,76.54 106.85,79.34 109.22,79.34 109.61,79.73 109.61,80.89 105.79,84.71 JP1.P$3 | v58.7,64.6 52.87,58.77 52.87,49.86 JP3.4 | v33.25,44.85 33.44,44.65 33.44,18.86 U6.P15
SCK
  Top 0.2: JP2.3 123.91,72.91 | 123.91,72.91 121.83,74.99 U1.17 | U2.P4 84.83,98.39 86.29,96.93 111.13,96.93 123.91,84.15 123.91,72.91
SCL  (via drill 0.4)
  Top 0.2: R2.2 127.62,66.02 U5.P8 123.49,66.02 122.06,64.58 v122.06,64.33 | U1.28 105.14,76.43 v105.36,76.43
  Bottom 0.2: v122.06,64.33 121.3,65.09 116.69,65.09 v105.36,76.43
SDA  (via drill 0.4)
  Top 0.2: R1.2 127.98,63.78 127.02,64.75 U5.P7 124.96,64.7 v123.37,64.7 | U1.27 105.61,77.08 105.63,77.08 106.21,76.5 v106.31,76.5
  Bottom 0.2: v123.37,64.7 123.28,64.7 122.26,65.72 117.09,65.72 v106.31,76.5
SW2  (via drill 0.4)
  Top 0.2: U1.25 105.67,79.29 105.67,81.32 104.91,82.08 R5.2 103.8,83 v101,83
  Bottom 0.2: S2.1 S2.2 76.5,73.5 80,77 97,77 100.03,80.03 100.03,82.03 v101,83
SW3  (via drill 0.4)
  Top 0.2: S3.1 S3.2 | U1.26 102.62,81.21 R7.2 101.08,82.08 v101,82 | U1.26
  Bottom 0.2: v101,82 101,78 81.5,58.5 S3.2
TXO  (via drill 0.4)  (1 unrouted)
  Top 0.2: JP3.3 JP5.3 J1.P$2 | v103.3,74.39 103.3,74.87 U1.31 95.62,82.56 64.92,82.56 60.05,77.68 60.05,66.08 v59.97,66 | J1.P$1 35.4,44.9 v34.1,43.6
  Bottom 0.2: v103.3,74.39 103.3,74.4 103.24,74.46 103.24,79.17 103.25,79.18 JP1.P$2 | v34.1,43.6 34.1,16.98 U6.P14 | JP3.3 55,45.53 52.52,48.02 52.52,59.35 59.17,66 v59.97,66
XLVO
  Top 0.61: D1.1 L1.P$1 17.37,51.31 19.24,49.44 19.84,49.44 22.02,47.27 P1.P2
(copper drawn outside any net)
  shapes: Bottom area x1, Top area x1

## Text on the board
tPlace: PCB Serial #- | PCB Serial #- | RST / SCK / MISO | GND / MOSI / 3v3 | Solder after / programming | GND / 5V
bPlace: ESP32-CAM
tNames: TGM Mk1 Rev1 / Ishaan Raghunandan / Adithyaa Designs '22 | Tx / Rx / 12v / GND | 3.3v UART | GND / 3v3 | GND / 12v / CPWR / INT0 / RX / TX / GND / +5V | GND / 12v / CPWR / INT0 / RX / TX / GND / +5V | TGM Mk1 Rev1 / Ishaan Raghunandan / Adithyaa Designs '22 | Strain relief | CZL-601 / Pinouts / A+ G / A- W / E- B / E+ R | E+ / E- / A- / A+ | E+ / E- / A- / A+ | E+ / E- / A- / A+ | E+ / E- / A- / A+
bNames: PIR | 5V S GND